# EAGLE board sensor_board_v0.54_trace (EAGLE 8.1.0)
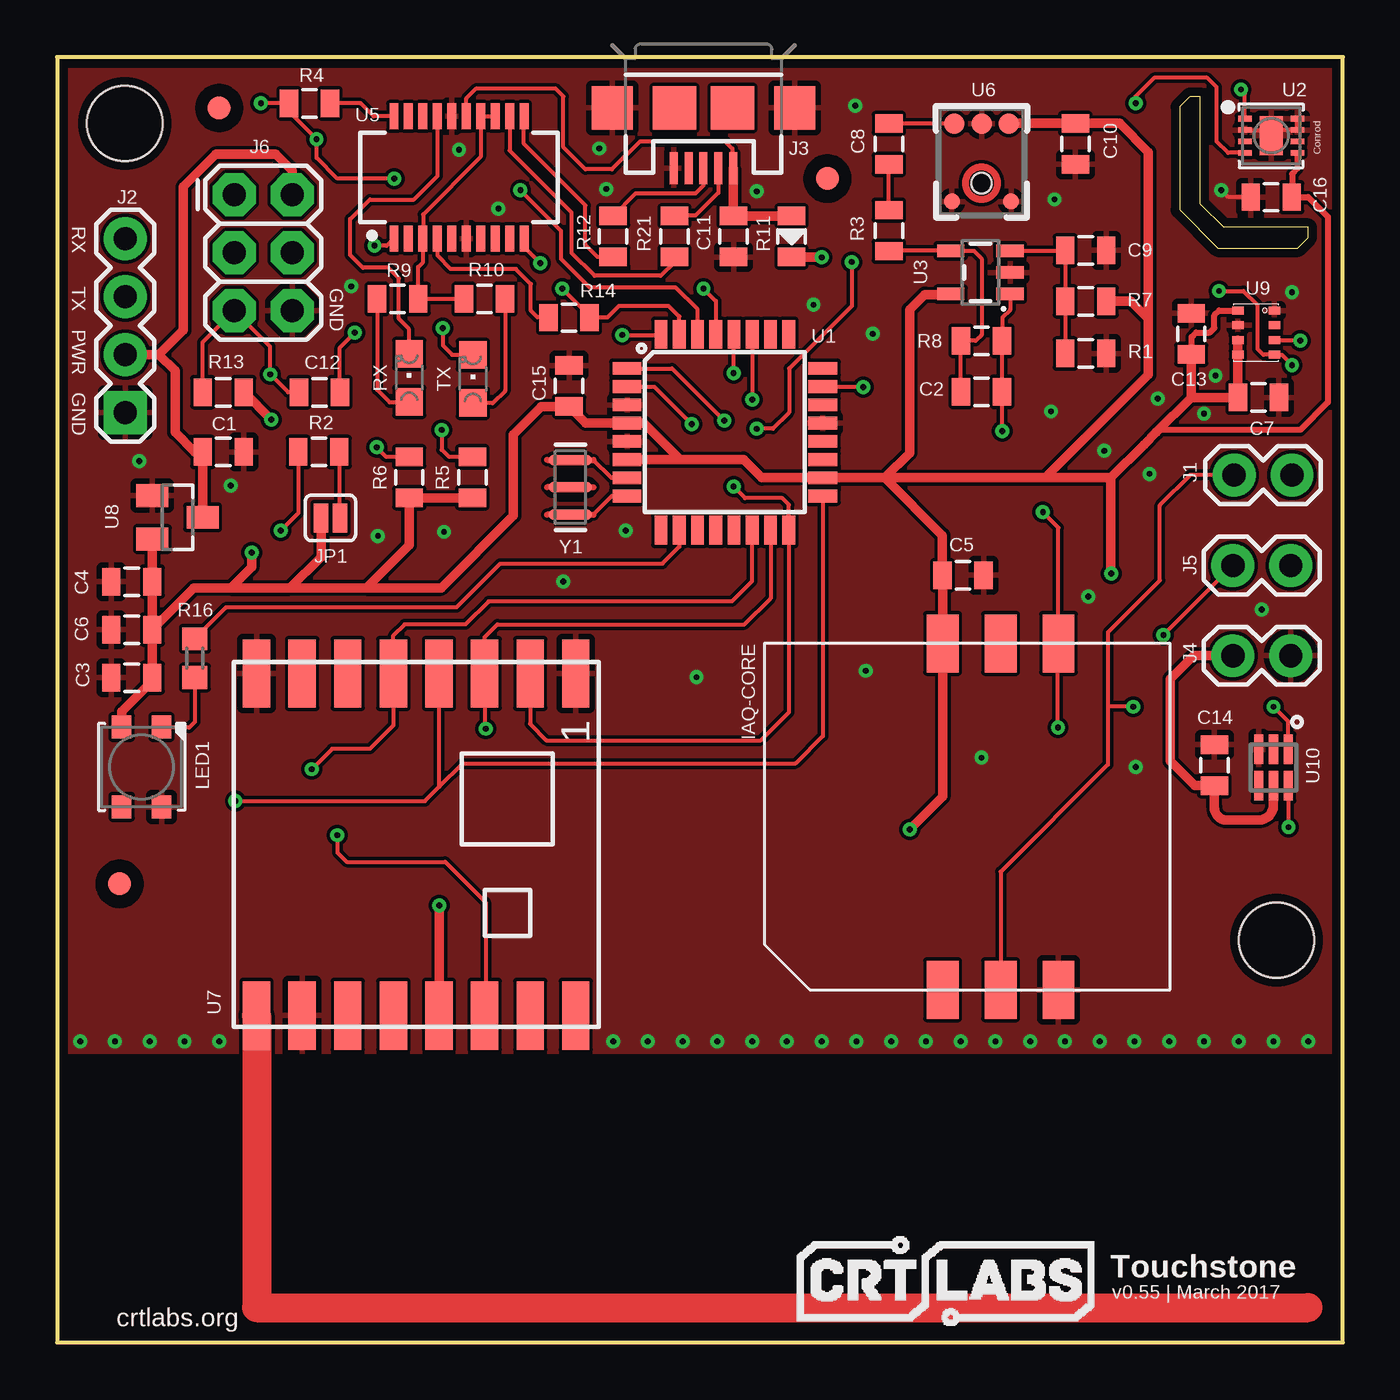
[diagram p0: board, top side]
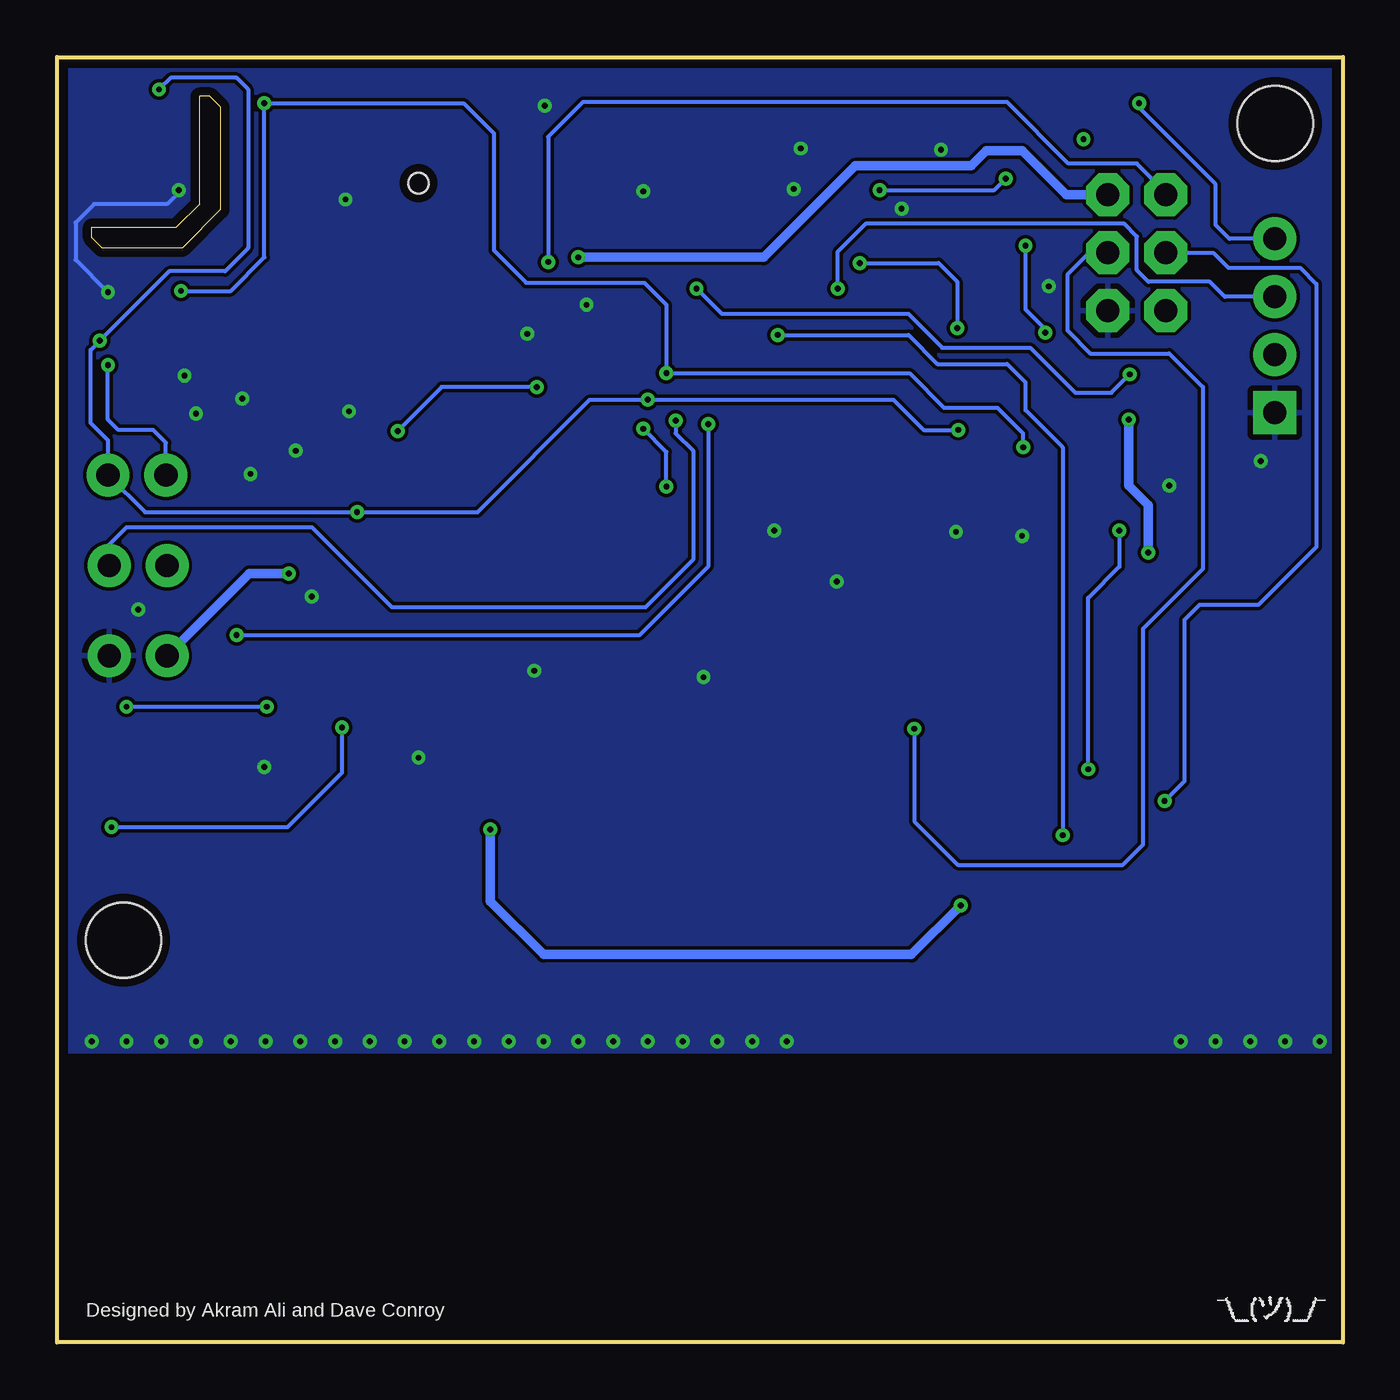
[diagram p1: board, bottom side, seen from below]

Size 56.39 x 56.39 mm. Coordinates in mm from the lower left corner, seen from the top.
Outline: 50.14,49.94 50.14,54.66 49.68,54.66 49.23,54.2 49.23,49.68 50.9,48.01 54.41,48.01 54.86,48.46 54.86,48.92 51.16,48.92 50.14,49.94
Outline: 0,56.39 0,0 56.39,0 56.39,56.39 0,56.39
Copper layers (1*16): Top 0.0356mm / dielectric 1.5011mm / Bottom 0.0356mm
Design rules "oshpark-2layer": minimum track width 6mil, minimum drill 13mil, track to track 6mil, track to pad 6mil, pad to pad 6mil, via to via 6mil, smd to smd 6mil, copper to edge 15mil, drill to drill 6mil, minimum pad ring 7mil, minimum via ring 7mil, stop-mask expansion 2.5mil, vias tented up to drill 0mil, thermal gap 10mil
Net classes: 1 power: width 0.381 mm, clearance 0.254 mm

## Footprints (pad centres in the part's own frame; a part is rotated, then mirrored left to right if it is on the bottom)
0805 = smd 0.8 x 1.2: 1 -0.9,0; 2 0.9,0
STAND-OFF = hole 3.302: 0,0
IAQ-CORE = smd 2.54 x 1.4: GND 0,-12.9; NC 0,-7.82; NC2 15.2,-10.36; SCL 0,-10.36; SDA 15.2,-12.9; VCC 15.2,-7.82
1X02 = drill 1.016 pad 1.88: 1 0,0; 2 2.54,0
1X04 = drill 1.016 pad 1.88 square: 1 0,0 | drill 1.016 pad 1.88: 2 2.54,0; 3 5.08,0; 4 7.62,0
USB-MICROB = smd 0.35 x 1.4: D+ 0,2.65; D- -0.65,2.65; GND 1.3,2.65; ID 0.65,2.65; VBUS -1.3,2.65 | smd 1.8 x 1.9: MT1 -4,0; MT2 4,0 | smd 1.9 x 1.9: P$1 -1.27,0; P$2 1.27,0
2X3 = drill 1.016 pad 1.88 octagon: 1 0,0; 2 0,2.54; 3 2.54,0; 4 2.54,2.54; 5 5.08,0; 6 5.08,2.54
PAD-JUMPER-2-NC_BY_PASTE_YES_SILK_FULL_BOX = smd 0.635 x 1.27: 1 -0.412,0; 2 0.412,0
LED3535 = smd 1 x 0.85: 1 -1.75,0.875; 2 -1.75,-0.875; 3 1.75,-0.875; 4 1.75,0.875
R0603 = smd 1 x 1.1: 1 -0.85,0; 2 0.85,0
CHIPLED_0805 = smd 1.2 x 1.2: A 0,-1.05; C 0,1.05
TQFP32-08 = smd 1.27 x 0.559: 1 -4.293,2.8; 2 -4.293,2; 3 -4.293,1.2; 4 -4.293,0.4; 5 -4.293,-0.4; 6 -4.293,-1.2; 7 -4.293,-2; 8 -4.293,-2.8; 17 4.293,-2.8; 18 4.293,-2; 19 4.293,-1.2; 20 4.293,-0.4; 21 4.293,0.4; 22 4.293,1.2; 23 4.293,2; 24 4.293,2.8 | smd 0.559 x 1.27: 9 -2.8,-4.293; 10 -2,-4.293; 11 -1.2,-4.293; 12 -0.4,-4.293; 13 0.4,-4.293; 14 1.2,-4.293; 15 2,-4.293; 16 2.8,-4.293; 25 2.8,4.293; 26 2,4.293; 27 1.2,4.293; 28 0.4,4.293; 29 -0.4,4.293; 30 -1.2,4.293; 31 -2,4.293; 32 -2.8,4.293
SHT3X = smd 0.6 x 0.25: 1 -1.15,0.75; 2 -1.15,0.25; 3 -1.15,-0.25; 4 -1.15,-0.75; 5 1.15,-0.75; 6 1.15,-0.25; 7 1.15,0.25; 8 1.15,0.75 | smd 1 x 1.7: THERMAL 0,0
SOT23-5 = smd 0.55 x 1.2: 1 -0.95,-1.3; 2 0,-1.3; 3 0.95,-1.3; 4 0.95,1.3; 5 -0.95,1.3
SSOP20_L = smd 0.381 x 1.143: 1 -2.857,-2.68; 2 -2.223,-2.68; 3 -1.587,-2.68; 4 -0.953,-2.68; 5 -0.318,-2.68; 6 0.318,-2.68; 7 0.953,-2.68; 8 1.587,-2.68; 9 2.223,-2.68; 10 2.857,-2.68; 11 2.857,2.68; 12 2.223,2.68; 13 1.587,2.68; 14 0.953,2.68; 15 0.318,2.68; 16 -0.318,2.68; 17 -0.953,2.68; 18 -1.587,2.68; 19 -2.223,2.68; 20 -2.857,2.68
ADMP401 = smd 0.9 x 0.9: 1 -1.2,2.62; 5 1.2,2.62; 6 0,2.62 | smd 0.7 x 0.7: 2 1.3,-0.8; 4 -1.3,-0.8 | hole 0.9: 0,0
RFM69HCW-XXXS2 = smd 3 x 1.2: 1 -7.5,7; 2 -7.5,5; 3 -7.5,3; 4 -7.5,1; 5 -7.5,-1; 6 -7.5,-3; 7 -7.5,-5; 8 -7.5,-7; 9 7.5,-7; 10 7.5,-5; 11 7.5,-3; 12 7.5,-1; 13 7.5,1; 14 7.5,3; 15 7.5,5; 16 7.5,7
SOT23 = smd 1 x 1.4: 1 -0.95,-1.1; 2 0.95,-1.1; 3 0,1.1
BMP280 = smd 0.35 x 0.5: 1 0.975,-0.8; 2 0.325,-0.8; 3 -0.325,-0.8; 4 -0.975,-0.8; 5 -0.975,0.8; 6 -0.325,0.8; 7 0.325,0.8; 8 0.975,0.8
DFN6_TAOS = smd 1.3 x 0.4: 1 -0.8,0.65; 2 -0.8,0; 3 -0.8,-0.65; 4 0.8,-0.65; 5 0.8,0; 6 0.8,0.65
FIDUCIAL_1MM = smd 1 x 1: 1 0,0
RESONATOR-SMD = smd 0.45 x 1.905: 1 -1.2,0; 2 0,0; 3 1.2,0

## Placement (x,y rotation side)
C1  1uF  [0805]  7.29,39.07 0 top
C2  100pF  [0805]  40.54,41.71 0 top
C3  1uF  [0805]  3.28,29.16 180 top
C4  10uF  [0805]  3.28,33.38 180 top
C5  0.1uF  [0805]  39.73,33.66 0 top
C6  0.1uF  [0805]  3.28,31.27 180 top
C7  0.1uF  [0805]  52.68,41.45 0 top
C8  4.7uF  [0805]  36.47,52.58 270 top
C9  1uF  [0805]  45.11,47.9 0 top
C10  0.1uF  [0805]  44.65,52.58 270 top
C11  0.1uF  [0805]  29.67,48.51 270 top
C12  0.1uF  [0805]  11.51,41.68 180 top
C13  0.1uF  [0805]  49.73,44.25 90 top
C14  0.1uF  [0805]  50.75,25.32 270 top
C15  0.1uF  [0805]  22.45,41.96 90 top
C16  0.1uF  [0805]  53.24,50.24 180 top
H1  STAND-OFF  [STAND-OFF]  2.97,53.47 0 top
H2  STAND-OFF  [STAND-OFF]  53.47,17.65 0 top
IAQ-CORE  IAQ-CORE  [IAQ-CORE]  31.01,15.47 90 top
J1  [1X02]  51.61,38.05 0 top
J2  [1X04]  3,40.79 90 top
J3  USB-MICROB  [USB-MICROB]  28.35,54.15 180 top
J4  [1X02]  54.1,30.12 180 top
J5  [1X02]  51.56,34.09 0 top
J6  AVR_SPI_PRG_6PTH  [2X3]  7.77,50.34 270 top
JP1  JUMPER-PAD-2-NC_BY_PASTEFULL-BOX-SILK  [PAD-JUMPER-2-NC_BY_PASTE_YES_SILK_FULL_BOX]  11.99,36.17 180 top
LED1  WS2812B3535  [LED3535]  3.71,25.25 270 top
R1  10K  [0805]  45.11,43.38 180 top
R2  10K  [0805]  11.48,39.07 0 top
R3  1.5K  [0805]  36.47,48.77 90 top
R4  1K  [0805]  11.07,54.36 0 top
R5  10K  [0805]  18.21,37.95 270 top
R6  10K  [0805]  15.44,37.95 270 top
R7  10K  [0805]  45.11,45.67 0 top
R8  100K  [0805]  40.54,43.94 180 top
R9  47  [0805]  14.94,45.77 180 top
R10  47  [0805]  18.75,45.77 0 top
R11  SHOTTKY  [0805]  32.21,48.51 90 top
R12  27  [0805]  24.38,48.51 90 top
R13  10K  [0805]  7.29,41.68 0 top
R14  1K  [0805]  22.45,44.96 180 top
R16  470  [R0603]  6.05,30.02 90 top
R21  27  [0805]  27.08,48.51 90 top
RX  [CHIPLED_0805]  15.44,42.32 0 top
TX  [CHIPLED_0805]  18.24,42.27 0 top
U1  ATMEGA328P  [TQFP32-08]  29.29,39.93 0 top
U2  SHT35  [SHT3X]  53.24,52.93 0 top
U3  OPA344  [SOT23-5]  40.49,46.94 90 top
U5  FT231XS  [SSOP20_L]  17.63,51.1 0 top
U6  ADMP401  [ADMP401]  40.54,50.85 0 top
U7  RFM69HCW  [RFM69HCW-XXXS2]  15.75,21.84 270 top
U8  MCP1703CB  [SOT23]  5.28,36.19 270 top
U9  BMP280  [BMP280]  52.58,44.3 90 top
U10  TSL2591  [DFN6_TAOS]  53.34,25.22 270 top
U$1  FIDUCIAL  [FIDUCIAL_1MM]  7.11,54.15 0 top
U$2  FIDUCIAL  [FIDUCIAL_1MM]  2.74,20.12 0 top
U$3  FIDUCIAL  [FIDUCIAL_1MM]  33.78,51.05 0 top
Y1  16MHZ  [RESONATOR-SMD]  22.5,37.52 270 top

## Library data of the parts
C1 C3 C9 = SparkFun-Capacitors; MPN: CC0805ZRY5V8BB105
C2 = SparkFun-Capacitors; MPN: CC0805JRNPOABN101
C4 = SparkFun-Capacitors; MPN: CC0805KKX5R6BB106
C5 C7 C12-C16 = SparkFun-Passives; MPN: CC0805KRX7R9BB104
C6 C10 C11 = SparkFun-Capacitors; MPN: CC0805KRX7R9BB104
C8 = SparkFun-Capacitors; MPN: CC0805KKX7R6BB475
H1 H2 = SparkFun-Electromechanical
IAQ-CORE = IAQ-CORE; MPN: IAQ-CORE C; OC_NEWARK: 82Y5455
J1 J4-J6 = SparkFun-Connectors
J2 = SparkFun-Connectors; PROD_ID: CONN-09696
J3 = SparkFun-Connectors; MPN: 47346-0001; PROD_ID: CONN-09505
JP1 = SparkFun-Passives
LED1 = adafruit; MPN: SK6812 mini
R1 R2 R7 R13 = SparkFun-Passives; MPN: RC0805FR-0710KL
R3 = SparkFun-Passives; MPN: RC0805FR-071K5L
R4 R14 = SparkFun-Passives; MPN: RC0805FR-071KL
R5 R6 = SparkFun-Resistors; MPN: RC0805FR-0710KL
R8 = SparkFun-Passives; MPN: RC0805FR-07100KL
R9 R10 = SparkFun-Passives; MPN: RC0805FR-0747RL
R11 = SparkFun-Passives; MPN: SD0805S040S0R5; OC_NEWARK: unknown
R12 R21 = SparkFun-Passives; MPN: RC0805FR-0727RL
R16 = adafruit; MPN: RC0805FR-07470RL
RX TX = adafruit; MPN: LG R971-KN-1; OC_NEWARK: unknown
U1 = SparkFun-DigitalIC; MPN: ATMEGA328PB-AU; OC_NEWARK: 58Y6083; PROD_ID: IC-09069
U2 = Adafruit SHT31; MPN: SHT35-DIS-B
U3 = SparkFun-AnalogIC; MPN: OPA344NA/3K; PROD_ID: IC-08251
U5 = SparkFun-DigitalIC; MPN: FT231XQ-R; PROD_ID: IC-11524
U6 = SparkFun-Sensors; MPN: INMP401ACEZ-R7
U7 = SparkFun-RF; MPN: RFM69HW; PROD_ID: IC-11997, IC-12053
U8 = linear; MPN: MCP1703T-2502E/CB; OC_NEWARK: 18T9177
U9 = bosch-bmp280; MPN: BMP280
U10 = TSL2591; MPN: TSL25911FN
U$1-U$3 = adafruit
Y1 = SparkFun-FreqCtrl; MPN: CSTCE16M0V53-R0; OC_NEWARK: unknown; PROD_ID: XTAL-08900

## Nets
A0: C2.2 R8.1 U1.23 U3.1
ANA: U7.9
D2: U1.32 U7.14
D3: J5.2 U1.1
D4: J5.1 U1.2
D6: R16.2 U1.10
DTR: C12.1 U5.1
FTDI_VCC: R9.1 R10.1 U5.3 U5.13 U5.14
GND: C1.2 C3.2 C4.2 C5.2 C6.2 C7.2 C9.2 C10.2 C11.2 C13.2 C14.1 C15.2 C16.2 IAQ-CORE.GND J2.1 J3.GND J3.MT1 J3.MT2 J4.1 J6.6 LED1.4 R1.1 U1.3 U1.5 U1.21 U2.2 U2.7 U2.8 U2.THERMAL U3.2 U5.6 U5.16 U6.2 U6.4 U6.6 U7.1 U7.8 U7.10 U8.1 U9.1 U9.7 U10.3 Y1.2
MISO: J6.1 U1.16 U7.2
MOSI: J6.4 U1.15 U7.3
N$1: JP1.1 R2.2
N$2: R14.2 U5.4
N$3: R4.2 U5.20
N$4: U1.8 Y1.3
N$5: U1.7 Y1.1
N$7: LED1.1 R16.1
N$9: C8.2 R3.2
N$10: C2.1 R3.1 R8.2 U3.4
N$11: C9.1 R1.2 R7.1 U3.3
N$17: RX.C U5.17
N$18: TX.C U5.10
N$25: R21.1 U5.12
N$26: R12.1 U5.11
N$27: R9.2 RX.A
N$29: R10.2 TX.A
N$32: J3.D- R21.2
N$33: J3.D+ R12.2
OUT: C8.1 U6.1
PWR: C1.1 J2.2 J6.2 R11.1 U8.3
RESET: C12.2 J6.5 R13.1 U1.29
RX: J2.4 R4.1 U1.30
SCK: J6.3 U1.17 U7.4
SCL: IAQ-CORE.SCL J1.1 R6.1 U1.28 U2.4 U9.4 U10.1
SDA: IAQ-CORE.SDA J1.2 R5.1 U1.27 U2.1 U9.3 U10.6
SS: R2.1 U1.14 U7.5
TX: J2.3 R14.1 U1.31
VBUS: C11.1 J3.VBUS R11.2 U5.15
VCC: C3.1 C4.1 C5.1 C6.1 C7.1 C10.1 C13.1 C14.2 C15.1 C16.1 IAQ-CORE.VCC J4.2 JP1.2 LED1.2 R5.2 R6.2 R7.2 R13.2 U1.4 U1.6 U1.18 U2.5 U3.5 U6.5 U7.13 U8.2 U9.5 U9.6 U9.8 U10.5

## Tracks (layer width: path | path; a pad name or v marks a point on that pad's centre or on a via)
A0  (via drill 0.25 pad 0.13)
  Top 0.178: U3.1 41.79,45.29 41.45,44.96 41.45,43.96 R8.1 C2.2 41.45,41.69 v41.45,39.98 | U1.23 35.34,41.93 v35.36,41.91
  Bottom 0.178: v35.36,41.91 39.52,41.91 v41.45,39.98
ANA
  Top 1.27: U7.9 8.75,1.52 54.86,1.52
D2  (via drill 0.25 pad 0.13)
  Top 0.178: v24.79,44.2 26.46,44.2 U1.32 | v12.29,22.25 12.29,21.49 12.7,21.08 17.02,21.08 18.8,19.3 18.8,14.39 U7.14
  Bottom 0.178: v24.79,44.2 19.05,44.2 17.78,42.93 14.73,42.93 13.92,42.11 13.92,40.89 12.29,39.27 v12.29,22.25
D3  (via drill 0.25 pad 0.13)
  Top 0.178: U1.1 26.97,42.73 v29.26,40.44
  Bottom 0.178: v29.26,40.44 29.26,39.88 28.5,39.12 28.5,34.34 30.58,32.26 41.71,32.26 45.21,35.76 53.34,35.76 54.1,35 J5.2
D4  (via drill 0.25 pad 0.13)
  Top 0.178: U1.2 26.19,41.93 v27.84,40.28 | J5.1 v48.51,31.04
  Bottom 0.178: v27.84,40.28 27.84,34.04 30.84,31.04 v48.51,31.04
D6
  Top 0.178: R16.2 7.43,32.26 17.53,32.26 19.43,34.16 26.54,34.16 27.29,34.91 U1.10
DTR  (via drill 0.25 pad 0.13)
  Top 0.178: U5.1 14.45,48.11 v13.92,48.11 | C12.1 12.41,43.65 v13.06,44.3
  Bottom 0.178: v13.92,48.11 13.92,45.31 13.06,44.45 v13.06,44.3
FTDI_VCC
  Top 0.178: U5.13 U5.14 18.58,52.01 16.05,49.48 16.05,48.44 U5.3 16.05,48.41 16.05,47.4 15.84,47.18 R9.1 R10.1
GND  (via drill 0.25 pad 0.13)
  Top 0.178: U2.2 52.99,53.18 U2.THERMAL 53.49,53.18 U2.7 U2.8 | C16.2 51.36,50.24 v51.05,50.55
  Bottom 0.178: v51.05,50.55 51.05,50.44 51.56,49.94 54.76,49.94 55.58,49.12 55.58,47.5 v54.15,46.08
  other vias: 19.35,49.73 17.63,52.32 48.26,41.4 43.59,40.84 47.9,38.1 45.92,39.12 50.29,40.74 23.77,52.37 24.08,50.6 30.68,50.5 47.29,25.25 35.46,29.46 33.17,45.52 45.21,32.72 43.74,50.14 35,54.25 24.94,35.61 16.97,35.56 14.07,35.38 7.62,37.59 22.2,33.38 35.76,44.25 3.61,38.66 50.8,42.42 40.54,25.65 52.83,32.16 12.9,46.33 28.04,29.18 1.02,13.21 2.54,13.21 4.06,13.21 5.59,13.21 7.11,13.21 24.38,13.21 25.91,13.21 27.43,13.21 28.96,13.21 30.48,13.21 32,13.21 33.53,13.21 35.05,13.21 36.58,13.21 38.1,13.21 39.62,13.21 41.15,13.21 42.67,13.21 44.2,13.21 45.72,13.21 47.24,13.21 48.77,13.21 50.29,13.21 51.82,13.21 53.34,13.21 54.86,13.21
  pour Top: -0.84,12.75 56.9,12.75 57.02,57.45 -0.71,57.45
  pour Bottom: -0.66,56.24 -0.91,12.75 56.34,12.75 56.59,57.45 -0.61,57.45 -0.61,56.24
MISO  (via drill 0.25 pad 0.13)
  Top 0.178: v34.85,47.4 34.85,45.47 32.11,42.72 32.11,40.79 31.39,40.08 v30.68,40.08 | v29.67,37.54 30.18,37.03 31.8,37.03 32.09,36.75 U1.16 32.09,27.64 30.86,26.42 21.46,26.42 20.75,27.13 U7.2
  Bottom 0.178: v34.85,47.4 34.85,52.88 33.33,54.41 14.73,54.41 12.04,51.71 9.04,51.71 7.77,50.44 J6.1 | v29.67,37.54 29.67,39.06 v30.68,40.08
MOSI  (via drill 0.25 pad 0.13)
  Top 0.178: U1.15 31.29,32.64 30.14,31.5 19.3,31.5 18.75,30.94 U7.3 18.75,26.97 v18.8,26.92
  Bottom 0.178: 10.31,47.85 J6.4 11.12,47.8 12.09,46.84 12.09,44.4 11.07,43.38 7.62,43.38 6.15,41.91 6.15,33.93 8.76,31.32 8.76,21.84 9.65,20.95 16.89,20.95 18.8,22.86 v18.8,26.92
N$1
  Top 0.178: R2.2 12.38,36.19 JP1.1
N$2
  Top 0.178: U5.4 16.68,47.69 17.27,47.09 20.12,47.09 20.78,46.43 20.78,45.26 21.07,44.97 21.54,44.97 R14.2
N$3
  Top 0.178: U5.20 13.88,53.78 13.31,54.36 R4.2
N$4
  Top 0.178: U1.8 24.33,37.13 23.52,36.32
N$5
  Top 0.178: U1.7 24.31,37.93 23.52,38.72
N$7
  Top 0.178: R16.1 6.05,27.23 5.79,26.98 4.61,26.98 LED1.1
N$9
  Top 0.178: R3.2 C8.2
N$10
  Top 0.178: C2.1 R8.2 40.28,43.94 40.54,44.2 40.54,47.55 40.2,47.89 U3.4 36.5,47.89 R3.1
N$11
  Top 0.178: U3.3 44.2,47.89 C9.1 R7.1 R1.2
N$17
  Top 0.178: RX.C 15.44,44.45 14.99,44.91 14.99,46.69 14.53,47.14 13.41,47.14 12.85,47.7 12.85,49.28 13.72,50.14 15.65,50.14 16.68,51.17 U5.17
N$18  (via drill 0.25 pad 0.13)
  Top 0.178: U5.10 20.48,48.04 v21.18,47.35 | v16.92,44.5 16.92,43.74 17.32,43.33 18.22,43.33 TX.C
  Bottom 0.178: v21.18,47.35 17.73,47.35 16.92,46.53 v16.92,44.5
N$25
  Top 0.178: U5.12 19.85,52.29 22.55,49.58 22.55,47.8 23.57,46.79 26.47,46.79 27.08,47.4 R21.1
N$26
  Top 0.178: R12.1 23.71,47.61 23.16,48.16 23.16,49.89 20.47,52.58 20.47,53.77 U5.11
N$27
  Top 0.178: R9.2 14.04,41.79 14.58,41.25 15.43,41.25 RX.A
N$29
  Top 0.178: R10.2 19.64,41.74 19.1,41.2 18.25,41.2 TX.A
N$32
  Top 0.178: J3.D- 29,50.43 27.99,49.43 R21.2
N$33
  Top 0.178: J3.D+ 28.35,50.75 27.99,50.39 25.36,50.39 R12.2
OUT
  Top 0.178: C8.1 U6.1
PWR  (via drill 0.25 pad 0.13)
  Top 0.305: 32.22,47.6 R11.1
  Top 0.406: v33.53,47.6 32.22,47.6 | J6.2 10.31,51.41 9.6,52.12 6.96,52.12 5.54,50.7 5.54,44.4 4.47,43.33 | 4.47,43.33 J2.2 | U8.3 C1.1 6.05,39.06 5.18,39.93 5.18,42.62 4.47,43.33
  Bottom 0.406: v33.53,47.6 25.4,47.6 21.39,51.61 16.31,51.61 15.65,52.27 14.07,52.27 12.14,50.34 J6.2
RESET  (via drill 0.25 pad 0.13)
  Top 0.178: v28.35,46.23 28.89,45.69 U1.29 | R13.1 6.39,43.88 J6.5 9.35,43.69 v9.35,42.47 10.14,41.68 C12.2
  Bottom 0.178: v9.35,42.47 10.16,41.66 11.73,41.66 13.72,43.64 17.58,43.64 19.05,45.11 27.23,45.11 v28.35,46.23
RX  (via drill 0.25 pad 0.13)
  Top 0.178: U1.30 28.09,45.32 27.13,46.28 23.37,46.28 22.1,47.55 22.1,48.77 v20.32,50.55 | v14.78,51.05 12.29,51.05 11.38,51.97 v11.38,52.78 10.17,53.99 R4.1 v8.94,54.36
  Bottom 0.178: v20.32,50.55 15.29,50.55 v14.78,51.05 | J2.4 4.98,48.41 5.59,49.02 5.59,50.8 8.94,54.15 v8.94,54.36
SCK  (via drill 0.25 pad 0.13)
  Top 0.178: U1.17 33.58,26.59 32.38,25.4 17.78,25.4 16.76,24.38 | v7.82,23.75 16.13,23.75 16.76,24.38 | 16.76,24.38 16.76,29.33 U7.4
  Bottom 0.178: J6.3 5.69,47.8 5.03,47.14 1.88,47.14 1.17,46.43 1.17,34.9 3.71,32.36 6.3,32.36 6.96,31.7 6.96,24.61 v7.82,23.75
SCL  (via drill 0.25 pad 0.13)
  Top 0.178: R6.1 14.44,38.85 v14.02,39.27 | v29.67,42.52 29.67,44.2 U1.28 | v54.15,42.88 53.7,43.32 U9.4 52.89,43.32 52.63,43.59 52.63,45.52 52.02,46.13 v50.95,46.13 | v47.3,54.36 47.3,54.66 48.11,55.47 50.44,55.47 50.85,55.07 50.85,52.68 51.35,52.18 U2.4 | J1.1 49.68,38.05 48.36,36.73 48.36,33.43 46.08,31.14 46.08,27.94 | 46.08,27.94 46.08,25.35 41.37,20.65 IAQ-CORE.SCL | U10.1 53.99,27.24 v53.34,27.89 | v47.19,27.89 46.13,27.89 46.08,27.94
  Bottom 0.178: v14.02,39.27 14.02,39.88 15.14,41 17.48,41 19,42.52 v29.67,42.52 29.67,45.52 30.63,46.48 35.81,46.48 37.24,47.9 37.24,53.03 38.56,54.36 v47.3,54.36 47.3,47.6 48.77,46.13 v50.95,46.13 | J1.1 51.61,39.47 52.17,40.03 53.7,40.03 54.15,40.49 v54.15,42.88 | v53.34,27.89 v47.19,27.89
SDA  (via drill 0.25 pad 0.13)
  Top 0.178: v16.87,40.03 16.87,39.17 17.17,38.86 18.2,38.86 R5.1 | v54.51,43.94 53.41,43.94 U9.3 | v51.91,54.96 v51.92,54.97 52.09,54.8 U2.1 | U10.6 v53.99,22.62 v54,22.61 | U1.27 v30.49,41.36 | v43.23,36.42 43.91,35.74 IAQ-CORE.SDA 43.89,30.65 v43.89,26.98
  Bottom 0.178: v16.87,40.03 18.39,40.03 19.72,41.36 v30.49,41.36 v30.49,41.35 33.02,41.35 37.95,36.42 v43.23,36.42 52.53,36.42 J1.2 54.15,39.57 54.91,40.33 54.91,43.54 v54.51,43.94 51.46,46.99 49.02,46.99 48.01,48.01 48.01,54.97 48.51,55.47 51.41,55.47 v51.92,54.97 51.71,55.17 | v54,22.61 46.28,22.61 43.89,24.99 v43.89,26.98
SS  (via drill 0.25 pad 0.13)
  Top 0.178: U1.14 30.48,33.4 29.59,32.51 18.92,32.51 17.91,31.5 15.24,31.5 14.73,30.99 14.73,29.36 U7.5 14.75,27.07 13.72,26.04 12.07,26.04 v11.18,25.15 | R2.1 10.58,36.39 v9.8,35.61
  Bottom 0.178: v9.8,35.61 9.8,34.04 11.18,32.66 v11.18,25.15
TX  (via drill 0.25 pad 0.13)
  Top 0.178: U1.31 27.29,45 26.82,45.47 24.64,45.47 24.13,44.96 R14.1 23.35,45.02 v22.15,46.23
  Bottom 0.178: J2.3 5.18,45.87 5.84,46.53 8.53,46.53 9.04,47.04 9.04,48.51 9.6,49.07 20.93,49.07 22.15,47.85 v22.15,46.23
VBUS
  Top 0.178: U5.15 17.95,54.57 18.39,55.02 21.84,55.02 22.2,54.66 22.2,52.43 23.16,51.46 24.33,51.46 25.55,52.68 29.31,52.68 29.62,52.38 29.62,51.53 J3.VBUS
  Top 0.305: 29.65,49.44 C11.1
  Top 0.406: J3.VBUS 29.65,49.44 | C11.1 R11.2
VCC  (via drill 0.25 pad 0.13)
  Top 0.254: 49.75,43.33 49.75,44.11 49.94,44.3 50.55,44.3 50.75,44.5 50.75,45.06 50.95,45.26 51.77,45.26 U9.8 | 54.29,50.24 C16.1 | U2.5 54.39,51.49 54.15,51.26 54.15,50.26 C16.1 | 48.11,39.83 47.68,39.39 | C16.1 54.86,50.24 55.73,49.38 55.73,41.25 54.51,40.03 48.31,40.03 48.21,39.93
  Top 0.406: 13.56,33.1 15.44,34.98 R6.2 R5.2 | 36.3,37.93 U1.18 30.91,37.93 30.11,38.73 27.33,38.73 | 36.3,37.93 37.39,39.01 37.39,45.31 38.05,45.97 39.17,45.97 U3.5 | U1.6 27.33,38.73 | 27.33,38.73 25.73,40.33 U1.4 23.18,40.33 C15.1 22.44,41.05 21.23,41.05 20.02,39.83 20.02,36.27 16.84,33.1 13.56,33.1 | 36.3,37.93 43.33,37.93 | 43.33,37.93 46.21,37.93 | 49.73,41.45 C7.1 U9.5 U9.6 | 49.73,41.45 C13.1 49.75,43.33 | 46.21,37.93 47.68,39.39 48.21,39.93 49.73,41.45 | 47.85,44.91 47.85,52.22 46.6,53.48 C10.1 U6.5 | 47.85,44.91 47.85,42.45 43.33,37.93 | R7.2 47.09,45.67 47.85,44.91 | LED1.2 2.84,27.01 2.84,27.69 4.18,29.02 C3.1 C6.1 | 46.21,37.93 46.21,33.75 v46.23,33.73 | J4.2 49.84,30.12 48.82,29.11 48.82,25.5 49.89,24.43 50.74,24.43 C14.2 50.75,23.47 arc90 51.31,22.91 52.68,22.91 arc90 53.34,23.57 U10.5 | 13.56,33.1 10.21,33.1 | JP1.2 11.58,34.46 10.21,33.1 | R13.2 8.2,41.68 v9.4,40.49 | U8.2 C4.1 C6.1 | C6.1 6,33.1 7.62,33.1 | 7.62,33.1 10.21,33.1 | 7.62,33.1 8.53,34.01 v8.53,34.65 | v16.76,19.18 16.76,14.36 U7.13 | 36.3,37.93 38.83,35.41 C5.1 IAQ-CORE.VCC 38.83,23.95 v37.39,22.5
  Bottom 0.406: v46.23,33.73 47.95,33.73 J4.2 | v9.4,40.49 9.4,37.59 8.53,36.73 v8.53,34.65 | v16.76,19.18 18.92,17.02 35.05,17.02 37.39,19.36 v37.39,22.5

## Text on the board
_tsilk: Conrod | RX | TX | GND | PWR | GND | Touchstone | crtlabs.org | v0.55 | March 2017
_bsilk: Designed by Akram Ali and Dave Conroy